# EAGLE board Steuerungsmodul (EAGLE 9.6.2)
BRD_SHEET_NAME: Steuerungsmodul Verstärker; PROJEKT_NAME: Verstärker_Innovativwoche; REVISION: 1.1; USER_NAME: Melcher-Millner/Scheffknecht
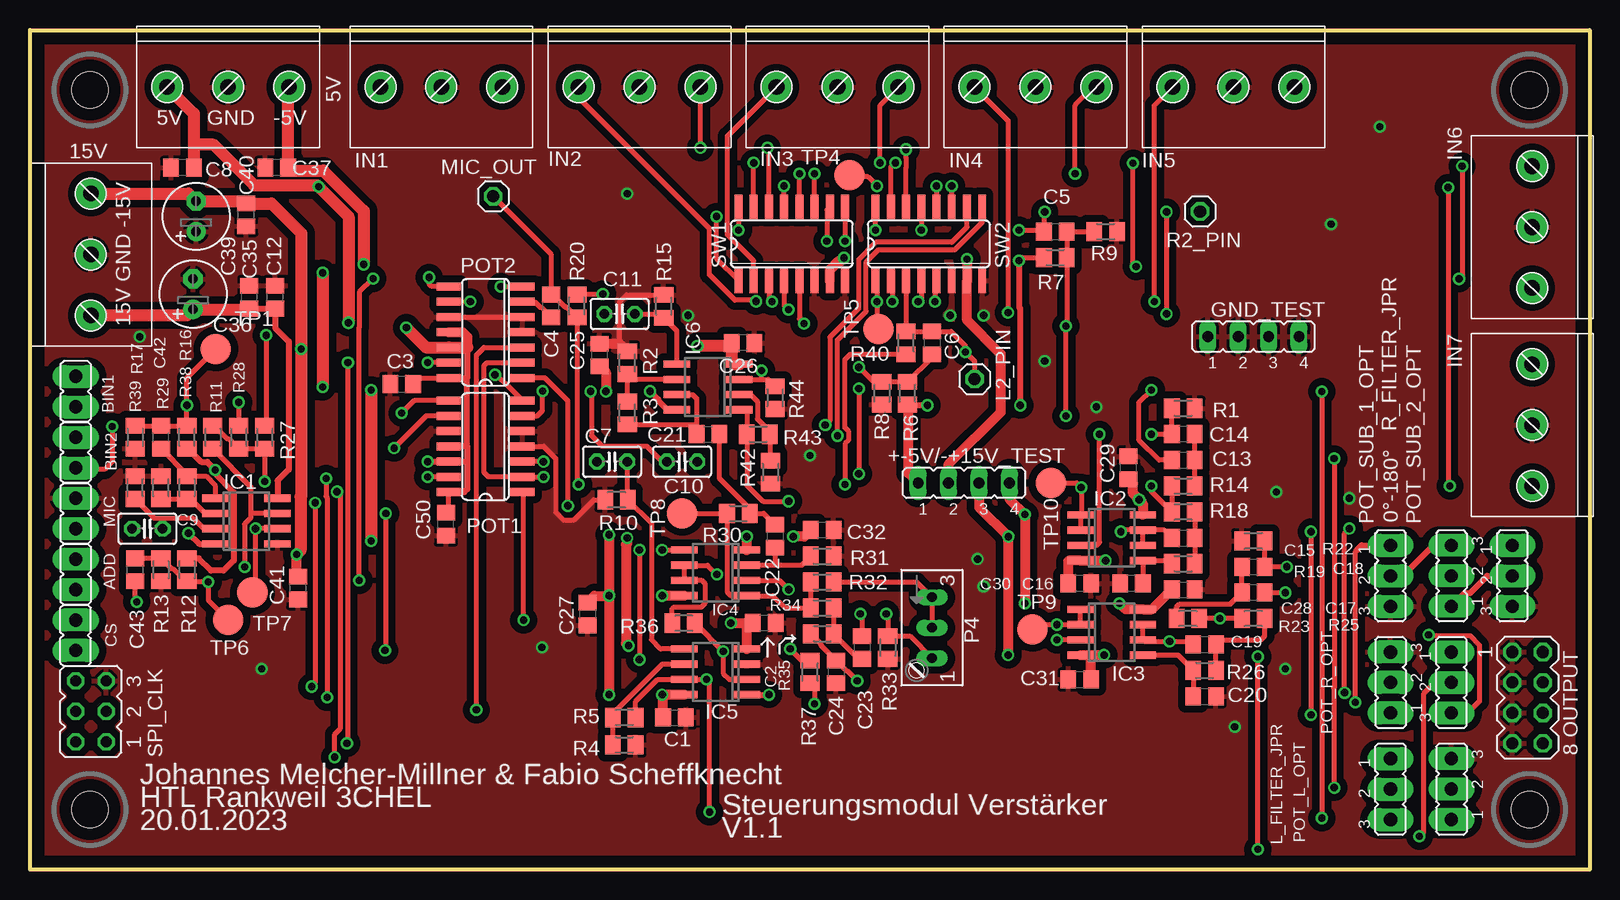
[diagram p0: board, top side]
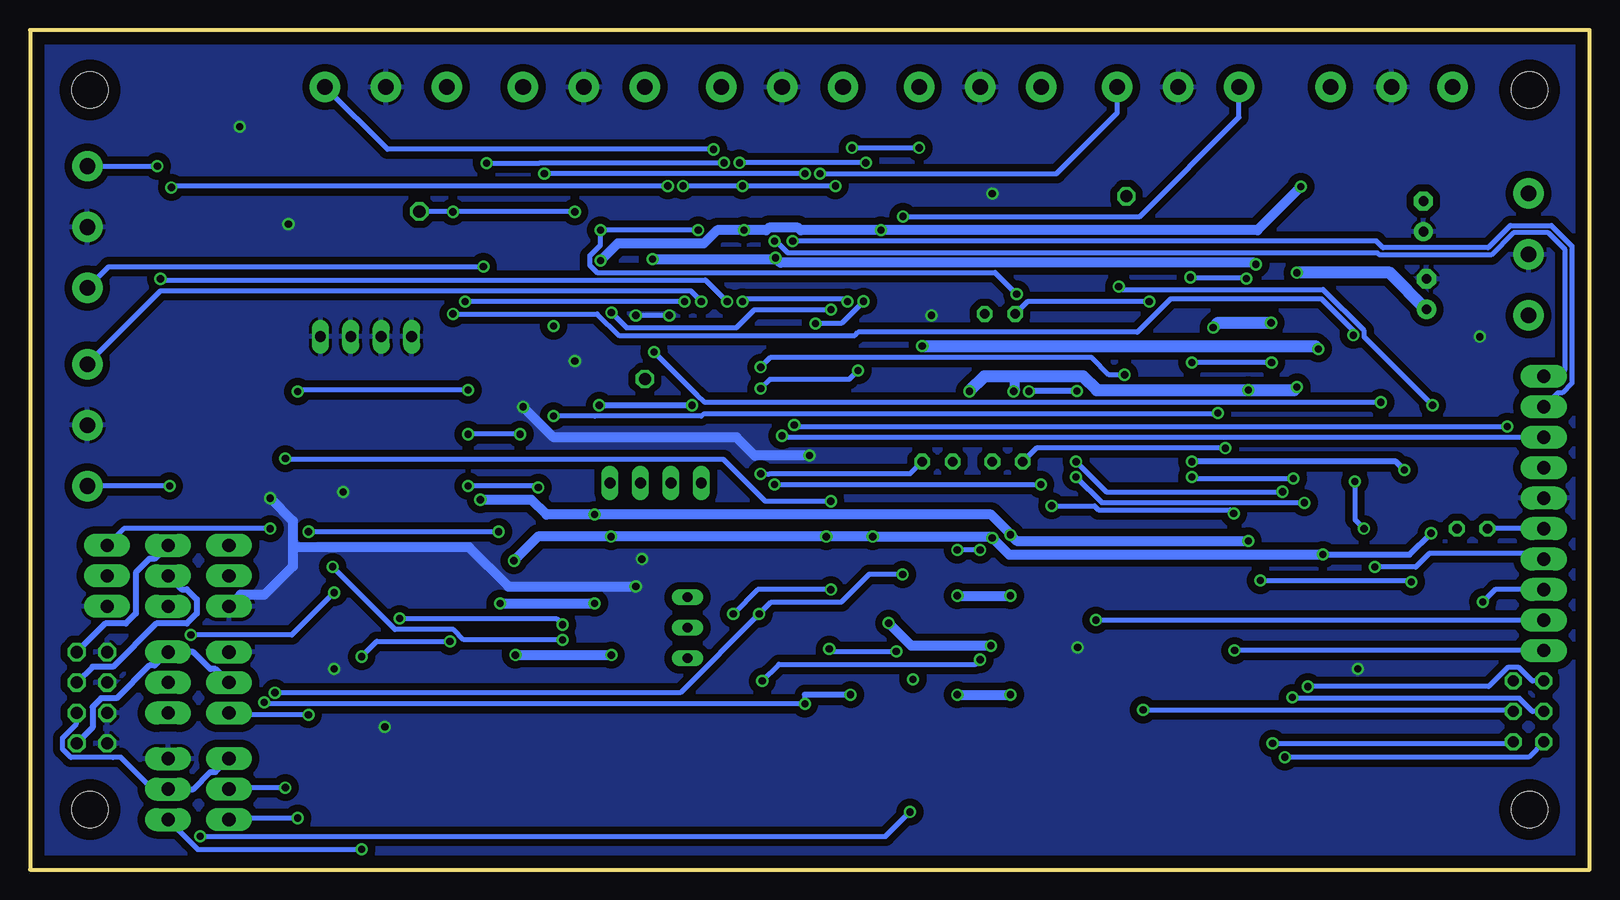
[diagram p1: board, bottom side, seen from below]

Size 130 x 70 mm. Coordinates in mm from the lower left corner, seen from the top.
Outline: 0,0 0,70 130,70 130,0 0,0
Copper layers (1*16): Top 0.035mm / dielectric 1.5mm / Bottom 0.035mm
Design rules "default *": minimum track width 16mil, minimum drill 0.6mm, track to track 8mil, track to pad 8mil, pad to pad 8mil, via to via 8mil, smd to smd 8mil, copper to edge 40mil, drill to drill 8mil, minimum pad ring 10mil, minimum via ring 8mil, stop-mask expansion 4mil, vias tented up to drill 0mil, thermal gap 10mil
Holes 3 mm at 5,5 5,65 125,65 125,5

## Footprints (pad centres in the part's own frame; a part is rotated, then mirrored left to right if it is on the bottom)
JMP3 = drill 1.1 pad 1.93 long: 1 -2.54,0; 2 0,0; 3 2.54,0
MKDS3/3_5,08 = drill 1.3 pad 2.54: P$1 -5.08,0; P$2 0,0; P$3 5.08,0
JP4 = drill 0.914 long: 1 -3.81,0; 2 -1.27,0; 3 1.27,0; 4 3.81,0
JMP2 = drill 1.1 pad 1.93 long: 1 0,-1.27; 2 0,1.27
C0805 = smd 1.3 x 1.5: 1 -0.95,0; 2 0.95,0
C025-025X050 = drill 0.813 octagon: 1 -1.27,0; 2 1.27,0
E2,5-6 = drill 0.813 pad 1.6: + -1.27,0 | drill 0.813 pad 1.6 octagon: - 1.27,0
SO08 = smd 0.6 x 2.2: 1 -1.905,-2.6; 2 -0.635,-2.6; 3 0.635,-2.6; 4 1.905,-2.6; 5 1.905,2.6; 6 0.635,2.6; 7 -0.635,2.6; 8 -1.905,2.6
1X01 = drill 1.016 octagon: 1 0,0
MA04-2 = drill 1.016 octagon: 1 -3.81,-1.27; 2 -3.81,1.27; 3 -1.27,-1.27; 4 -1.27,1.27; 5 1.27,-1.27; 6 1.27,1.27; 7 3.81,-1.27; 8 3.81,1.27
S64W = drill 0.813 long: A 2.54,1.27; E -2.54,1.27; S 0,1.27
SO14 = smd 0.66 x 2.032: 1 -3.81,-3.073; 2 -2.54,-3.073; 3 -1.27,-3.073; 4 0,-3.073; 5 1.27,-3.073; 6 2.54,-3.073; 7 3.81,-3.073; 8 3.81,3.073; 9 2.54,3.073; 10 1.27,3.073; 11 0,3.073; 12 -1.27,3.073; 13 -2.54,3.073; 14 -3.81,3.073
M0805 = smd 1.3 x 1.6: 1 -0.95,0; 2 0.95,0
JP3Q = drill 0.914 octagon: 1 -2.54,-1.27; 2 -2.54,1.27; 3 0,-1.27; 4 0,1.27; 5 2.54,-1.27; 6 2.54,1.27
SO-16 = smd 0.66 x 2.032: 1 -4.445,-3.073; 2 -3.175,-3.073; 3 -1.905,-3.073; 4 -0.635,-3.073; 5 0.635,-3.073; 6 1.905,-3.073; 7 3.175,-3.073; 8 4.445,-3.073; 9 4.445,3.073; 10 3.175,3.073; 11 1.905,3.073; 12 0.635,3.073; 13 -0.635,3.073; 14 -1.905,3.073; 15 -3.175,3.073; 16 -4.445,3.073
B2,54 = smd 2.54 x 2.54: TP 0,0

## Placement (x,y rotation side)
0°-180°  [JMP3]  118.49,24.48 90 top
5V  5V GND -5V  [MKDS3/3_5,08]  16.51,65.25 0 top
15V  15V GND -15V  [MKDS3/3_5,08]  5.08,51.28 90 top
+-5V/-+15V_TEST  [JP4]  77.85,32.23 0 top
ADD  [JMP2]  3.81,24.61 0 top
BIN1  1A0 1A1  [JMP2]  3.81,39.85 0 top
BIN2  2A0 2A1  [JMP2]  3.81,34.77 0 top
C1  100nF  [C0805]  53.72,12.67 0 top
C2  100nF  [C0805]  61.21,20.55 180 top
C3  100n  [C0805]  30.99,40.48 0 top
C4  [C0805]  43.43,46.99 90 top
C5  [C0805]  85.47,53.19 0 top
C6  [C0805]  75.18,43.91 270 top
C7  1uF  [C025-025X050]  48.51,34.01 0 top
C8  [C0805]  12.7,58.52 180 top
C9  1uF  [C025-025X050]  9.78,28.42 0 top
C10  1uF  [C025-025X050]  54.36,34.01 0 top
C11  1uF  [C025-025X050]  49.15,46.33 0 top
C12  100nF  [C0805]  20.45,47.72 90 top
C13  100nF  [C0805]  96.14,34.13 0 top
C14  100nF  [C0805]  96.14,36.29 180 top
C15  2.2nF  [C0805]  96.14,27.66 0 top
C16  1nF  [C0805]  91.82,23.85 180 top
C17  100nF  [C0805]  101.98,23.09 180 top
C18  100nF  [C0805]  101.98,25.25 0 top
C19  2.2nF  [C0805]  97.92,18.77 0 top
C20  1nF  [C0805]  97.92,14.45 0 top
C21  100nF  [C0805]  56.52,36.29 0 top
C22  100nF  [C0805]  62.1,27.79 270 top
C23  33nF  [C0805]  69.34,18.51 270 top
C24  10nF  [C0805]  67.18,16.48 270 top
C25  100nF  [C0805]  47.5,42.9 90 top
C26  100nF  [C0805]  59.44,43.91 180 top
C27  100nF  [C0805]  46.48,21.31 270 top
C28  100nF  [C0805]  96.14,23.34 0 top
C29  100nF  [C0805]  91.57,33.5 90 top
C30  100nF  [C0805]  87.5,23.85 180 top
C31  100nF  [C0805]  87.5,15.85 0 top
C32  100nF  [C0805]  66.04,28.29 180 top
C35  220pF  [C0805]  18.29,47.72 90 top
C36  100µF  [E2,5-6]  13.59,47.98 90 top
C37  [C0805]  20.57,58.52 180 top
C39  100µF  [E2,5-6]  13.84,54.45 90 top
C40  220pF  [C0805]  18.03,54.58 90 top
C41  100nF  [C0805]  22.35,23.47 90 top
C42  [C0805]  10.92,36.04 90 top
C43  [C0805]  8.76,24.99 90 top
C50  100n  [C0805]  34.67,28.79 90 top
CS  CS1 CS2  [JMP2]  3.81,19.53 180 top
GND_TEST  [JP4]  101.98,44.42 0 top
IC1  TL072D  [SO08]  18.03,29.05 270 top
IC2  TL072D  [SO08]  90.17,27.66 270 top
IC3  TL072D  [SO08]  90.17,19.78 270 top
IC4  TL072D  [SO08]  57.15,24.74 90 top
IC5  TL072D  [SO08]  57.15,16.48 90 top
IC6  TL072D  [SO08]  56.52,40.23 90 top
IN1  [MKDS3/3_5,08]  34.29,65.25 0 top
IN2  [MKDS3/3_5,08]  50.8,65.25 0 top
IN3  [MKDS3/3_5,08]  67.31,65.25 0 top
IN4  [MKDS3/3_5,08]  83.82,65.25 0 top
IN5  [MKDS3/3_5,08]  100.33,65.25 0 top
IN6  [MKDS3/3_5,08]  125.22,53.57 270 top
IN7  [MKDS3/3_5,08]  125.22,37.06 270 top
L2_PIN  [1X01]  78.74,40.89 0 top
L_FILTER_JPR  [JMP3]  113.41,6.7 270 top
MIC  [JMP2]  3.81,29.69 0 top
MIC_OUT  [1X01]  38.61,56.13 0 top
OUTPUT  [MA04-2]  124.84,14.32 270 top
P4  100k  [S64W]  73.91,20.16 270 top
POT1  MCP42010_SO14  [SO14]  37.97,35.28 90 top
POT2  MCP42010_SO14  [SO14]  37.97,44.8 90 top
POT_L_OPT  [JMP3]  118.49,6.7 90 top
POT_R_OPT  [JMP3]  113.41,15.59 90 top
POT_SUB_1_OPT  [JMP3]  113.41,24.48 270 top
POT_SUB_2_OPT  [JMP3]  123.57,24.48 270 top
R1  22k  [M0805]  96.14,38.45 180 top
R2  10k  [M0805]  49.78,42.26 270 top
R2_PIN  [1X01]  97.54,54.86 0 top
R3  47k  [M0805]  49.78,38.07 270 top
R4  10k  [M0805]  49.53,10.39 180 top
R5  47k  [M0805]  49.53,12.67 0 top
R6  [M0805]  73.15,39.72 270 top
R7  [M0805]  85.47,51.03 180 top
R8  [M0805]  70.99,39.72 90 top
R9  [M0805]  89.66,53.19 180 top
R10  100k  [M0805]  48.9,30.83 0 top
R11  [M0805]  15.24,36.04 90 top
R12  [M0805]  13.08,24.99 90 top
R13  [M0805]  10.92,24.99 90 top
R14  12k  [M0805]  96.14,31.98 180 top
R15  100k  [M0805]  52.83,46.96 270 top
R16  [M0805]  13.08,36.04 270 top
R17  [M0805]  8.76,36.04 90 top
R18  2.7k  [M0805]  96.14,29.82 0 top
R19  4.7k  [M0805]  96.14,25.5 180 top
R20  [M0805]  45.59,46.99 270 top
R22  22k  [M0805]  101.98,27.4 0 top
R23  12k  [M0805]  96.52,20.93 0 top
R25  2.7k  [M0805]  101.98,20.93 0 top
R26  4.7k  [M0805]  97.92,16.61 180 top
R27  [M0805]  19.56,36.04 90 top
R28  [M0805]  17.4,36.04 90 top
R29  10k  [M0805]  10.92,31.85 270 top
R30  56k  [M0805]  59.05,29.69 180 top
R31  56k  [M0805]  66.04,26.13 180 top
R32  47k  [M0805]  66.04,23.98 180 top
R33  100k  [M0805]  71.5,18.51 90 top
R34  75k  [M0805]  66.04,21.82 180 top
R35  150k  [M0805]  66.04,19.66 180 top
R36  10k  [M0805]  54.48,20.55 0 top
R37  10k  [M0805]  65.02,16.48 270 top
R38  1M  [M0805]  13.08,31.85 90 top
R39  100k  [M0805]  8.76,31.85 270 top
R40  [M0805]  73.03,43.91 270 top
R42  10k  [M0805]  61.72,33.12 90 top
R43  47k  [M0805]  60.71,36.29 180 top
R44  100k  [M0805]  62.1,39.34 90 top
R_FILTER_JPR  [JMP3]  118.49,15.59 270 top
SPI_CLK  [JP3Q]  5.08,13.18 90 top
SW1  4052  [SO-16]  63.5,52.17 0 top
SW2  4052  [SO-16]  74.93,52.17 0 top
TP1  TPB2,54  [B2,54]  15.49,43.41 0 top
TP4  TPB2,54  [B2,54]  68.33,57.88 0 top
TP5  TPB2,54  [B2,54]  70.74,45.06 0 top
TP6  TPB2,54  [B2,54]  16.51,20.8 0 top
TP7  TPB2,54  [B2,54]  18.54,23.09 0 top
TP8  TPB2,54  [B2,54]  54.36,29.69 0 top
TP9  TPB2,54  [B2,54]  83.57,20.04 0 top
TP10  TPB2,54  [B2,54]  85.09,32.23 0 top
U$1  [HTL-A4-H]  -57,-51 0 top  (outside the outline)

## Library data of the parts
0°-180° 5V 15V ADD BIN1 CS IN1-IN7 L_FILTER_JPR MIC POT_L_OPT POT_R_OPT POT_SUB_1_OPT POT_SUB_2_OPT R_FILTER_JPR = 0_HTL_elektro
+-5V/-+15V_TEST GND_TEST SPI_CLK = jumper
BIN2 = 0_HTL_elektro; SPICEPREFIX: B
C1-C6 C8 C12-C32 C35-C37 C39-C43 C50 = rcl; SPICEPREFIX: C
C7 C9-C11 = resistor
IC1-IC6 = linear
L2_PIN MIC_OUT R2_PIN = pinhead
OUTPUT = con-lstb; OC_FARNELL: unknown; OC_NEWARK: unknown
P4 = pot
POT1 POT2 SW1 SW2 = 0_Custom-Lib_Verstärker
R1-R20 R22 R23 R25-R40 R42-R44 = rcl; SPICEPREFIX: R
TP1 TP4-TP10 = testpad
U$1 = 0_HTL_frame; BRD_SHEET_NAME: Steuerungsmodul Verstärker; PROJEKT_NAME: Verstärker_Innovativwoche; REVISION: 1.1; USER_NAME: Melcher-Millner/Scheffknecht

## Nets
1A0: BIN1.1 SW1.10
1A1: BIN1.2 SW1.9
2A0: BIN2.1 SW2.10
2A1: BIN2.2 SW2.9
+5V: 5V.P$1 +-5V/-+15V_TEST.1 C3.2 C8.1 C50.2 POT1.11 POT1.12 POT1.14 POT2.11 POT2.12 POT2.14 R6.2 R7.2 R12.2 R16.2 SW1.16 SW2.16
+15V: 15V.P$1 +-5V/-+15V_TEST.4 C1.1 C12.1 C25.1 C27.1 C28.1 C29.1 C35.1 C36.+ IC1.8 IC2.8 IC3.8 IC4.8 IC5.8 IC6.8
-5V: 5V.P$3 +-5V/-+15V_TEST.2 C37.1 SW1.7 SW2.7
-15V: 15V.P$3 +-5V/-+15V_TEST.3 C2.2 C26.2 C30.2 C31.2 C32.2 C39.- C40.2 C41.2 IC1.4 IC2.4 IC3.4 IC4.4 IC5.4 IC6.4
GND: 5V.P$2 15V.P$2 C1.2 C2.1 C3.1 C8.2 C12.2 C16.2 C20.2 C24.2 C25.2 C26.1 C27.2 C28.2 C29.2 C30.1 C31.1 C32.1 C35.2 C36.- C37.2 C39.+ C40.1 C41.1 C50.1 GND_TEST.1 GND_TEST.2 GND_TEST.3 GND_TEST.4 IC1.5 IC5.3 IN1.P$2 IN2.P$2 IN3.P$2 IN4.P$2 IN5.P$2 IN6.P$2 IN7.P$2 MIC.2 OUTPUT.1 OUTPUT.3 OUTPUT.5 OUTPUT.7 POT1.4 POT1.5 POT1.10 POT2.4 POT2.5 POT2.10 POT_L_OPT.3 POT_R_OPT.3 POT_SUB_1_OPT.3 POT_SUB_2_OPT.3 R1.1 R2.1 R4.1 R8.1 R9.1 R10.1 R13.1 R15.1 R17.1 R22.1 R29.1 R31.1 R33.1 R39.1 R42.1 R44.1 SPI_CLK.5 SW1.6 SW1.8 SW2.6 SW2.8
L1: SW1.3 SW2.1 TP5.TP
L2: C6.1 L2_PIN.1 R28.2 R40.1 SW2.3
L3: C6.2 POT1.7 R6.1 R8.2
L4: C10.1 POT1.6
L5: C10.2 IC6.3 R44.2
L6: IC6.1 L_FILTER_JPR.2 R43.2
L_IN: C13.1 L_FILTER_JPR.3
L_OUT: L_FILTER_JPR.1 OUTPUT.6 POT_L_OPT.2
N$1: CS.2 POT2.1
N$2: CS.1 POT1.1
N$3: IC5.1 POT_SUB_1_OPT.1 R37.2
N$10: POT1.3 SPI_CLK.2
N$17: IC6.2 R42.2 R43.1
N$24: IC6.6 R2.2 R3.1
N$26: POT2.13 SPI_CLK.1
N$28: IC5.6 R4.2 R5.1
N$30: C9.1 MIC.1
N$31: POT1.13 SPI_CLK.4
N$32: POT2.3 SPI_CLK.3
N$34: C4.1 POT2.6
N$36: C42.2 POT2.7 R16.1 R17.2 TP1.TP
N$37: POT1.2 POT2.2 SPI_CLK.6
N$38: IN1.P$3 SW1.12
N$39: IN1.P$1 SW1.1
N$40: IN2.P$3 SW1.14
N$41: IN2.P$1 SW1.5
N$42: IN3.P$3 SW1.15
N$43: IN3.P$1 SW1.2
N$44: IN4.P$3 SW1.11
N$45: IN4.P$1 SW1.4
N$46: IN5.P$3 SW2.14
N$47: IN5.P$1 SW2.5
N$48: IN6.P$3 SW2.15
N$49: IN6.P$1 SW2.2
N$50: IN7.P$3 SW2.11
N$51: IN7.P$1 SW2.4
N$53: C9.2 IC1.3 R39.2
N$56: IC2.1 IC2.2 R14.2 R18.1 TP10.TP
N$57: C14.2 IC2.3 R1.2
N$58: C13.2 C14.1 R14.1
N$59: C15.2 R18.2 R19.1
N$60: C16.1 IC2.5 R19.2
N$61: C15.1 IC2.6 IC2.7 POT_R_OPT.1
N$62: IC1.2 R29.2 R38.1
N$64: ADD.1 C43.1
N$65: IC3.1 IC3.2 R23.2 R25.1 TP9.TP
N$66: C18.2 IC3.3 R22.2
N$67: C17.2 C18.1 R23.1
N$68: C19.2 R25.2 R26.1
N$69: C20.1 IC3.5 R26.2
N$70: C19.1 IC3.6 IC3.7 POT_L_OPT.1
N$71: C42.1 IC1.1 R38.2
N$72: C4.2 MIC_OUT.1 R20.2 R40.2
N$73: C21.2 C22.1 R30.1
N$74: C22.2 IC4.3 R31.2
N$75: IC4.1 R30.2 R32.2 R34.2 TP8.TP
N$76: IC4.2 P4.A R33.2
N$77: P4.E P4.S R32.1
N$78: C24.1 IC4.5 R35.2
N$79: C23.2 R34.1 R35.1
N$80: IC5.2 R36.2 R37.1
N$81: 0°-180°.1 POT_SUB_2_OPT.2
R1: SW1.13 SW2.12 TP4.TP
R2: C5.1 R2_PIN.1 R20.1 R27.2 SW2.13
R3: C5.2 POT1.8 R7.1 R9.2
R4: C7.1 POT1.9
R5: C7.2 IC5.5 R10.2
R6: IC5.7 R5.2 R_FILTER_JPR.2
R_IN: C17.1 R_FILTER_JPR.3
R_OUT: OUTPUT.8 POT_R_OPT.2 R_FILTER_JPR.1
SUB1: IC1.6 R11.2 R27.1 R28.1 TP7.TP
SUB2: ADD.2 IC1.7 R11.1
SUB3: C43.2 POT2.8 R12.1 R13.2 TP6.TP
SUB4: C11.1 POT2.9
SUB5: C11.2 IC6.5 R15.2
SUB_IN: C21.1 IC6.7 R3.2
SUB_OUT_1: 0°-180°.3 OUTPUT.2 POT_SUB_1_OPT.2
SUB_OUT_2: 0°-180°.2 OUTPUT.4
SUB_PHASE: C23.1 IC4.6 IC4.7 POT_SUB_2_OPT.1 R36.1

## Tracks (layer width: path | path; a pad name or v marks a point on that pad's centre or on a via)
1A0  (via drill 0.6)
  Top 0.406: SW1.10 66.42,54.99 v66.42,52.4
  Bottom 0.406: BIN1.1 2.64,39.75 2.28,39.75 1.47,40.55 1.47,51.99 3.17,53.69 6.6,53.69 8.45,51.85 17.21,51.85 17.76,52.4 v66.42,52.4
1A1  (via drill 0.6)
  Top 0.406: SW1.9 v67.94,52.4
  Bottom 0.406: v67.94,52.4 67.82,52.4 66.82,51.4 17.66,51.4 17.5,51.24 8.19,51.24 6.35,53.08 3.43,53.08 2.08,51.74 2.08,41.63 2.59,41.12 BIN1.2
2A0  (via drill 0.6)
  Top 0.406: v6.86,36.95 6.86,34.01 6.22,33.37 3.94,33.37 BIN2.1 | SW2.10 78.11,53.57 76.83,52.3 70.48,52.3 69.06,50.87 69.06,46.77 66.67,44.38 66.67,37.44 v66.29,37.06
  Bottom 0.406: v66.29,37.06 66.19,36.95 v6.86,36.95
2A1  (via drill 0.6)
  Top 0.406: SW2.9 79.38,53.97 77.09,51.69 70.74,51.69 69.7,50.65 69.7,46.54 67.31,44.15 v67.31,36.17
  Bottom 0.406: v67.31,36.17 67.18,36.04 BIN2.2
+5V  (via drill 0.6)
  Top 0.406: SW1.16 v59.05,53.31 | v70.48,53.31 SW2.16 | v82.44,50.77 82.7,51.03 R7.2 | C3.2 32.45,40.99 POT2.14 | C50.2 34.9,29.96 POT1.14
  Top 0.508: v82.44,50.77 82.44,46.88 82.55,46.78 v82.55,38.71 | v74.8,38.71 73.22,38.71 R6.2 | 36.45,43.53 36.45,40.99 | POT2.14 36.45,40.99 | 36.45,35.28 36.45,40.99 | 36.45,35.28 POT1.11 | 36.45,35.28 36.45,34.01 | 36.45,34.01 POT1.12 v33.15,34.01 | 36.45,34.01 36.45,31.72 36.2,31.47 POT1.14 | R16.2 13.14,35.09 14.25,33.98 14.77,33.98 v15.44,33.32 15.44,33 16.99,31.45 16.99,25.77 16.15,24.92 15.1,24.92 14.07,25.94 R12.2
  Top 0.813: POT2.11 36.07,44.8 36.45,44.42 36.45,43.53 | +-5V/-+15V_TEST.1 73.22,33.05 73.22,38.71
  Top 1.016: v26.54,45.59 26.54,54.45 v24.07,56.93 23.94,57.06 18.68,57.06 15.31,60.42 13.78,60.42 13.65,60.3 | 13.65,60.3 13.65,63.03 5V.P$1 | 13.65,60.3 C8.1 | v31.37,45.18 33.02,43.53 POT2.12 36.45,43.53
  Bottom 0.508: v74.8,38.71 v82.55,38.71 | v15.44,33.32 16.13,34.01 v33.15,34.01
  Bottom 0.813: v24.07,56.93 27.69,53.31 v59.05,53.31 65.76,53.31 65.96,53.52 68.41,53.52 68.61,53.31 v70.48,53.31 72.72,53.31 73.83,52.2 81.02,52.2 v82.44,50.77
  Bottom 1.016: v26.54,45.59 30.97,45.59 v31.37,45.18
+15V  (via drill 0.6)
  Top 0.406: IC6.8 53.14,38.33
  Top 0.508: C35.1 C12.1 20.45,45.15 21.57,44.03 21.57,33.35 20.63,32.42 IC1.8 | v51.68,39.88 52.36,39.2 52.36,39.11 53.14,38.33
  Top 0.813: IC5.8 v52.7,14.58 52.77,14.51 C1.1 | v48.26,27.91 v48.26,22.83 | v48.26,22.83 v48.26,14.58 | IC4.8 v52.7,22.83 | IC2.8 92.77,30.52 v92.46,30.83 91.95,31.34 91.95,32.17 C29.1 | v90.81,22.2 91.31,21.69 IC3.8 93.54,21.69 C28.1 | v82.93,22.2 v82.93,29.59 81.66,30.86 +-5V/-+15V_TEST.4 | C27.1 47.06,22.83 v48.26,22.83 | C25.1 48.01,41.44 v48.01,39.87
  Top 1.016: 15V.P$1 13.08,46.2 C36.+ 18.22,46.71 C35.1 | v24.38,49.76 v24.38,40.23 | v28.45,39.98 v28.45,27.4
  Bottom 0.813: v52.7,14.58 v48.26,14.58 | v28.45,27.4 47.75,27.4 v48.26,27.91 48.26,27.96 49.89,29.59 v82.93,29.59 86.95,29.59 88.19,30.83 v92.46,30.83 | v52.7,22.83 v48.26,22.83 | v90.81,22.2 v82.93,22.2 | v48.01,39.87 47.88,40 47.88,41.12
  Bottom 1.016: C36.+ 16.64,49.76 v24.38,49.76 | v24.38,40.23 24.64,39.98 v28.45,39.98 41.08,39.98 42.22,41.12 47.88,41.12 50.44,41.12 v51.68,39.88
-5V  (via drill 0.6)
  Top 0.813: +-5V/-+15V_TEST.2 76.58,33.79 80.9,38.11 80.9,43 78.11,45.79 SW2.7 v78.11,50.9 | SW1.7 66.67,50.03 67.36,50.72 67.57,50.72 v67.84,51
  Top 1.016: 5V.P$3 21.52,65.18 C37.1 21.77,58.28 24.45,58.28 27.81,54.91 v27.81,50.46
  Bottom 0.813: v78.11,50.9 67.94,50.9 v67.84,51 67.43,50.59 27.94,50.59 v27.81,50.46
-15V  (via drill 0.6)
  Top 0.508: v13.21,28.04 14.1,27.15 IC1.4
  Top 0.813: IC4.4 v59.75,27.76 | v49.78,27.66 49.78,27.2 49.69,27.1 49.69,18.86 v49.89,18.66 | v58.42,20.55 59.69,20.55 | 59.69,20.55 C2.2 | IC5.4 59.75,20.49 59.69,20.55 | IC3.4 88.39,17.88 | 88.39,17.88 v89.53,17.88 | v81.53,17.88 81.53,27.73 v81.56,27.76 79.12,30.2 +-5V/-+15V_TEST.3 | C30.2 86.55,25.69 86.61,25.75 IC2.4 v89.66,25.75 | C32.2 64.56,27.76 v63.63,27.76 | C41.2 22.23,24.54 v22.23,26.26 | C31.2 88.45,17.82 88.39,17.88
  Top 1.016: 15V.P$3 13.21,56.36 C39.- 17.84,55.73 C40.2 20.13,55.53 22.61,53.06 v22.61,43.41 22.61,31.13 22.55,31.08 22.55,26.59 v22.23,26.26 | v55.63,43.64 58.21,43.64 C26.2 58.49,42.32 58.67,42.14 IC6.4
  Bottom 0.508: v22.23,26.26 14.99,26.26 v13.21,28.04
  Bottom 0.813: v22.23,26.26 48.39,26.26 v49.78,27.66 49.88,27.76 v59.75,27.76 v63.63,27.76 v81.56,27.76 87.66,27.76 v89.66,25.75 | v49.89,18.66 56.54,18.66 v58.42,20.55 | v89.53,17.88 v81.53,17.88
  Bottom 1.016: v55.63,43.64 22.84,43.64 v22.61,43.41
GND  (via drill 0.6)
  Top 0.406: 49.15,43.85 49.15,47.34 49.72,47.91 R15.1 | POT1.4 42.81,35.28 43.81,34.28 43.81,29.8 44.45,29.16 45.34,29.16 47.01,30.83 R10.1 | POT2.10 POT2.5
  Top 0.813: C25.2 49.15,43.85 R2.1
  Bottom 0.406: v76.71,46.2 v79.5,46.2
  Bottom 0.813: POT_SUB_1_OPT.3 112.45,22.91 110.46,22.91 108.1,25.27 108.1,26.9 | v79.5,23.59 90.12,23.59 93.39,26.87 108.07,26.87 108.1,26.9 | v109.98,30.96 108.1,29.08 108.1,26.9 | v65.02,34.52 69.59,34.52 71.1,36.03 86.35,36.03 v88.9,38.58
  other vias: 19.3,16.74 42.67,18.51 9.14,44.42 100.42,11.89 78.99,25.88 84.58,42.39 103.89,31.47 104.65,16.74 108.46,53.82 112.52,61.95 49.78,56.36 54.86,46.2
  pour Top (isolate 0.61): 0,0 130,0 130,70 0,70
  pour Bottom (isolate 0.61): 0,0 0,70 130,70 130,0
L1  (via drill 0.6)
  Top 0.406: SW2.1 70.61,48.97 v70.61,47.34 70.61,45.18 TP5.TP | SW1.3 61.59,47.6 v61.85,47.34
  Bottom 0.406: v61.85,47.34 62.1,47.6 70.36,47.6 v70.61,47.34
L2  (via drill 0.6)
  Top 0.406: v17.4,38.96 R28.2 | SW2.3 R40.1 C6.1 76.77,44.86 77.98,43.66 v77.98,43.15 78.74,42.39 L2_PIN.1
  Bottom 0.406: v77.98,43.15 74.44,39.62 74.43,39.62 73.77,38.96 v17.4,38.96
L3  (via drill 0.6)
  Top 0.406: POT1.7 39.88,40.26 39.86,40.26 38.87,41.25 v38.76,41.25 | v69.09,41.88 70.3,40.67 R8.2 R6.1 75.18,42.7 C6.2
  Bottom 0.406: v38.76,41.25 40.04,41.25 41.47,42.67 68.3,42.67 v69.09,41.88
L4  (via drill 0.6)
  Top 0.406: POT1.6 42.29,37.82 42.73,38.25 v42.73,39.91 | v46.74,39.87 46.8,39.81 46.8,36.18 47.67,35.3 51.41,35.3 52.7,34.01 C10.1
  Bottom 0.508: v42.73,39.91 46.7,39.91 v46.74,39.87
L5  (via drill 0.6)
  Top 0.406: v69.09,40.1 v69.09,32.99 | IC6.3 60.98,40.87 | 60.98,40.87 61.53,40.87 R44.2 | 60.98,40.87 v60.98,41.6
  Bottom 0.406: v69.09,40.1 68.33,40.87 61.72,40.87 v60.98,41.6 | v69.09,32.99 68.34,32.99 68.32,33.01 56.62,33.01 C10.2
L6  (via drill 0.6)
  Top 0.406: IC6.1 59.75,38.33 59.76,38.32 R43.2 59.76,32.04 61.09,30.71 v63.25,30.71 | v108.71,34.26 108.71,15.16 108.67,15.12 108.67,6.87 v108.71,6.83
  Bottom 0.406: v63.25,30.71 68.71,30.71 72.2,34.2 108.65,34.2 v108.71,34.26 | v108.71,6.83 113.28,6.83 L_FILTER_JPR.2
L_IN  (via drill 0.6)
  Top 0.406: C13.1 94.11,34.13 92.46,35.79 92.46,38.96 v93.47,39.98 | v107.7,39.85 v107.7,4.29
  Bottom 0.406: v93.47,39.98 107.57,39.98 v107.7,39.85 | v107.7,4.29 113.28,4.29 L_FILTER_JPR.3
L_OUT
  Bottom 0.406: POT_L_OPT.2 119.76,6.7 122.43,9.37 123.06,9.37 123.09,9.35 126.59,9.35 127.28,10.03 127.28,11 126.11,12.16 OUTPUT.6
  Bottom 0.508: L_FILTER_JPR.1 114.53,8.12 114.97,8.12 116.39,6.7 POT_L_OPT.2
N$1  (via drill 0.6)
  Top 0.406: POT2.1 42.93,40.99 44.83,39.09 v44.83,30.32 | v29.66,29.68 29.66,18.33 v29.59,18.26
  Bottom 0.406: CS.2 v29.59,18.26 | v44.83,30.32 41.26,30.32 40.92,29.98 29.96,29.98 v29.66,29.68
N$2  (via drill 0.6)
  Top 0.406: v41.15,20.8 41.15,31.37 POT1.1
  Bottom 0.406: v41.15,20.8 CS.1
N$3  (via drill 0.6)
  Top 0.406: R37.2 65.41,15.15 v65.41,13.81 | v110.49,13.94 110.49,26.52 110.62,26.64
  Top 0.508: IC5.1 v61.59,14.58 | 110.62,26.64 111,27.02 POT_SUB_1_OPT.1
  Bottom 0.406: 65.41,14.58 v65.41,13.81 110.36,13.81 v110.49,13.94
  Bottom 0.508: v61.59,14.58 65.41,14.58
N$10  (via drill 0.6)
  Top 0.406: v42.8,34.01 POT1.3 | v25.4,9.37 25.4,11.27 25.84,11.71 25.84,31.24 v25.59,31.5
  Bottom 0.406: v42.8,34.01 40.29,31.5 v25.59,31.5 | SPI_CLK.2 5.08,9.37 v25.4,9.37
N$17
  Top 0.406: IC6.2 60.07,39.6 60.64,39.03 60.64,37.56 61.66,36.55 R43.1 61.72,36.23 R42.2
N$24
  Top 0.406: IC6.6 50.23,40.87 R2.2 R3.1
N$26  (via drill 0.6)
  Top 0.406: POT2.13 v33.15,42.26 | v26.5,42.26 26.5,10.6 v26.42,10.51
  Bottom 0.406: v26.42,10.51 6.48,10.51 SPI_CLK.1 | v26.5,42.26 v33.15,42.26
N$28
  Top 0.406: IC5.6 52.7,17.12 48.58,12.99 R5.1 R4.2
N$30
  Bottom 0.406: MIC.1 C9.1
N$31  (via drill 0.6)
  Top 0.406: POT1.13 v33.15,32.74 | v24.77,14.34 24.77,31.04 24.68,31.12 v24.68,32.61
  Bottom 0.406: v33.15,32.74 33.02,32.61 v24.68,32.61 | SPI_CLK.4 4.77,13.18 5.89,14.3 24.72,14.3 v24.77,14.34
N$32  (via drill 0.6)
  Top 0.406: v37.21,13.31 37.21,42.9 37.85,43.53 POT2.3
  Bottom 0.406: v37.21,13.31 6.48,13.31 SPI_CLK.3
N$34
  Top 0.406: C4.1 42.59,46.88 42.52,46.88 42.06,47.34 POT2.6
N$36  (via drill 0.6)
  Top 0.406: R17.2 C42.2 R16.1 v13.08,38.71 13.08,40.99 TP1.TP | v39.24,48.61 POT2.7
  Bottom 0.406: v13.08,38.71 18.77,44.4 18.77,44.93 22.21,48.36 38.99,48.36 v39.24,48.61
N$37  (via drill 0.6)
  Top 0.406: POT2.2 38.1,42.26 37.85,42.01 37.85,33.12 38.23,32.74 POT1.2 42.8,32.74 v42.81,32.73 | v23.77,30.58 23.77,15.55 v23.47,15.25
  Bottom 0.406: v42.81,32.73 40.67,30.59 v23.78,30.59 v23.77,30.58 | v23.47,15.25 8.4,15.25 6.81,16.84 5.89,16.84 4.77,15.72 SPI_CLK.6
N$38  (via drill 0.6)
  Top 0.406: SW1.12 v64.14,58.01
  Bottom 0.406: v64.14,58.01 44.45,58.01 39.37,63.09 IN1.P$3
N$39  (via drill 0.6)
  Top 0.406: SW1.1 57.24,50.91 v57.24,54.45
  Bottom 0.406: v57.24,54.45 37.47,54.45 29.21,62.71 IN1.P$1
N$40  (via drill 0.6)
  Top 0.406: SW1.14 61.59,60.04 v61.47,60.17 | v55.88,60.17 IN2.P$3
  Bottom 0.406: v61.47,60.17 v55.88,60.17
N$41  (via drill 0.6)
  Top 0.406: IN2.P$1 45.72,64.36 56.63,53.45 56.63,49.6 58.76,47.47 60.42,47.47 v60.51,47.37 | SW1.5 64.14,45.91 v64.52,45.52
  Bottom 0.406: v60.51,47.37 62.36,45.52 v64.52,45.52
N$42  (via drill 0.6)
  Top 0.406: SW1.15 v60.33,58.92 | v70.87,58.92 70.87,63.73 IN3.P$3
  Bottom 0.406: v60.33,58.92 v70.87,58.92
N$43
  Top 0.406: SW1.2 60.33,50.76 58.15,52.94 58.15,61.15 62.23,65.23 IN3.P$1
N$44  (via drill 0.6)
  Top 0.406: SW1.11 v65.41,58.01 | v87.12,58.01 87.12,63.73 88.65,65.25 IN4.P$3
  Bottom 0.406: v65.41,58.01 v87.12,58.01
N$45  (via drill 0.6)
  Top 0.406: IN4.P$1 81.53,62.46 v81.53,46.43 | SW1.4 62.87,47.05 v63.23,46.69
  Bottom 0.406: v81.53,46.43 80.28,45.18 71.12,45.18 69.62,46.69 v63.23,46.69
N$46  (via drill 0.6)
  Top 0.406: SW2.14 73.03,58.52 73.05,58.54 73.05,59.3 73.03,59.32 v73.03,60.04
  Bottom 0.406: v73.03,60.04 100.2,60.04 IN5.P$3
N$47  (via drill 0.6)
  Top 0.406: SW2.5 75.44,48.97 v75.44,47.34 | v93.73,47.34 93.73,63.73 IN5.P$1
  Bottom 0.406: v75.44,47.34 v93.73,47.34
N$48  (via drill 0.6)
  Top 0.406: SW2.15 71.75,58.52 71.78,58.54 71.78,58.56 v72.14,58.92 | v92.2,50.26 91.95,50.52 v91.95,58.9
  Bottom 0.406: IN6.P$3 123.44,50.26 v92.2,50.26 | v91.95,58.9 87.52,58.9 87.5,58.92 v72.14,58.92
N$49  (via drill 0.6)
  Top 0.406: SW2.2 71.88,48.97 v71.88,47.34 | v119.38,58.65 119.38,49.5 v119.13,49.25
  Bottom 0.406: v71.88,47.34 73.7,49.16 119.04,49.16 v119.13,49.25 | IN6.P$1 v119.38,58.65
N$50  (via drill 0.6)
  Top 0.406: SW2.11 v76.83,56.99 | v118.22,56.87 118.22,32.12 v118.36,31.98
  Bottom 0.406: v76.83,56.99 118.09,56.99 v118.22,56.87 | v118.36,31.98 IN7.P$3
N$51  (via drill 0.6)
  Top 0.406: SW2.4 74.3,47.6 v74.04,47.34
  Bottom 0.406: v74.04,47.34 74.04,47.36 74.93,48.25 119.11,48.25 IN7.P$1
N$53
  Top 0.406: IC1.3 14.48,28.42 13.59,29.31 11.05,29.31 | R39.2 10.35,29.31 11.05,29.31 | C9.2 11.05,29.31
N$56  (via drill 0.6)
  Top 0.406: v93.47,31.98 93.47,31.53 R18.1 R14.2 | IC2.2 IC2.1 87.63,29.62 v87.63,31.85 87.25,32.23 TP10.TP
  Bottom 0.406: v93.47,31.98 87.76,31.98 v87.63,31.85
N$57  (via drill 0.6)
  Top 0.406: IC2.3 88.9,27.02 89.15,27.28 v89.15,36.29 | v93.47,36.29 C14.2 R1.2
  Bottom 0.406: v89.15,36.29 v93.47,36.29
N$58
  Top 0.406: R14.1 C13.2 C14.1
N$59
  Top 0.406: R18.2 C15.2 R19.1
N$60
  Top 0.406: R19.2 94.94,25.75 IC2.5 C16.1
N$61  (via drill 0.6)
  Top 0.406: IC2.6 IC2.7 | C15.1 94.55,28.29 IC2.7 | IC2.7 91.06,28.29 v90.93,28.17 | v106.79,28.17 v106.79,12.9
  Bottom 0.406: v90.93,28.17 v106.79,28.17 | v106.79,12.9 113.26,12.9 POT_R_OPT.1
N$62
  Top 0.406: IC1.2 14.61,29.69 13.4,30.9 R38.1 R29.2
N$64  (via drill 0.6)
  Top 0.406: v8.89,22.32 8.76,22.45 C43.1
  Bottom 0.406: ADD.1 7.87,23.34 v8.89,22.32
N$65  (via drill 0.6)
  Top 0.406: IC3.1 IC3.2 v85.6,20.42 83.95,20.42 TP9.TP | R25.1 v99.19,20.93 R23.2
  Bottom 0.406: v99.19,20.93 86.11,20.93 v85.6,20.42
N$66  (via drill 0.6)
  Top 0.406: R22.2 C18.2 v104.78,25.25 | IC3.3 v85.6,19.15
  Bottom 0.406: v104.78,25.25 100.1,20.57 100.1,20.55 99.56,20.02 94.7,20.02 93.84,19.15 v85.6,19.15
N$67
  Top 0.406: C18.1 C17.2 100.08,22.13 95.82,22.13 95.57,21.88 R23.1
N$68
  Top 0.406: R26.1 C19.2 99.25,19.15 102.62,19.15 102.93,19.46 R25.2
N$69
  Top 0.406: IC3.5 95.7,17.88 R26.2 C20.1
N$70  (via drill 0.6)
  Top 0.406: IC3.7 IC3.6 92.9,19.02 v95,19.02 96.71,19.02 C19.1 | v102.36,1.68 v102.36,17.75
  Bottom 0.406: POT_L_OPT.1 116.73,2.41 116.73,2.39 116.03,1.68 v102.36,1.68 | v102.36,17.75 101.09,19.02 v95,19.02
N$71
  Top 0.406: C42.1 13.08,32.93 R38.2 14.67,32.8 15.43,32.04 IC1.1
N$72  (via drill 0.6)
  Top 0.406: v67.94,32.1 67.94,35.52 68.22,35.79 68.22,36.54 67.92,36.84 67.92,42.51 68.38,42.96 R40.2 | v45.74,32.1 45.59,32.25 R20.2 44.75,46.88 44.62,46.88 43.57,47.94 C4.2 43.43,51.31 MIC_OUT.1
  Bottom 0.406: v67.94,32.1 v45.74,32.1
N$73
  Top 0.406: C21.2 57.47,32.61 60.01,30.07 R30.1 61.15,29.69 C22.1
N$74
  Top 0.406: R31.2 64.33,25.37 62.1,25.37 | 62.1,25.37 IC4.3 | C22.2 62.1,25.37
N$75
  Top 0.406: R32.2 R34.2 62.93,21.82 61.91,22.83 IC4.1 58.42,22.83 58.17,23.09 58.17,29.63 R30.2 TP8.TP
N$76  (via drill 0.6)
  Top 0.406: IC4.2 62.48,24.1 v63.25,23.34 | v71.37,21.31 71.5,21.18 R33.2 73.34,19.46 P4.A
  Bottom 0.406: v63.25,23.34 69.34,23.34 v71.37,21.31
N$77
  Top 0.406: R32.1 73.91,23.98 P4.E P4.S
N$78  (via drill 0.6)
  Top 0.406: v52.7,26.64 IC4.5 | v50.8,26.64 v50.8,17.5 | R35.2 65.93,18.81 65.93,18.69 C24.1 68.03,16.59 68.1,16.59 68.34,16.35 68.34,16.34 v68.96,15.72
  Bottom 0.406: v68.96,15.72 67.56,17.12 51.18,17.12 v50.8,17.5 | v50.8,26.64 v52.7,26.64
N$79
  Top 0.406: R34.1 R35.1 69.08,17.56 C23.2
N$80  (via drill 0.6)
  Top 0.406: R36.2 v57.78,18.19 57.78,16.36 58.29,15.85 IC5.2 | R37.1 64.33,17.43 v63.37,18.39
  Bottom 0.406: v63.37,18.39 63.18,18.19 v57.78,18.19
N$81
  Top 0.508: 0°-180°.1 119.61,23.06 120.05,23.06 121.47,24.48 POT_SUB_2_OPT.2
R1  (via drill 0.6)
  Top 0.406: SW1.13 v62.87,56.99 | v75.56,56.99 SW2.12 | TP4.TP 68.45,57.76 69.85,57.76 v70.61,56.99
  Bottom 0.406: v62.87,56.99 v70.61,56.99 v75.56,56.99
R2  (via drill 0.6)
  Top 0.406: SW2.13 v74.3,53.31 | v82.44,53.31 84.39,53.31 C5.1 84.58,53.25 v84.58,54.84 | v94.74,54.84 v94.74,46.33 | R20.1 45.63,47.98 v47.75,47.98 | v19.68,44.55 19.68,37.12 R27.2
  Bottom 0.406: v74.3,53.31 v82.44,53.31 82.44,52.06 83.35,51.15 83.35,50.4 82.73,49.77 49.55,49.77 v47.75,47.98 | v84.58,54.84 v94.74,54.84 97.51,54.84 R2_PIN.1 | v94.74,46.33 82.71,46.33 80.92,44.53 61.23,44.53 60.96,44.8 37.7,44.8 34.91,47.6 22.35,47.6 19.68,44.93 v19.68,44.55
R3  (via drill 0.6)
  Top 0.406: R9.2 C5.2 R7.1 86.42,45.37 v86.36,45.31 v86.36,37.82 | POT1.8 32.02,39.09 v30.99,38.05
  Bottom 0.406: v30.99,38.05 31.33,38.05 31.41,37.97 73.87,37.97 74.05,37.8 82.93,37.8 82.95,37.82 v86.36,37.82
R4  (via drill 0.6)
  Top 0.406: POT1.9 33.04,37.82 v30.35,35.13
  Bottom 0.406: C7.1 46.12,35.13 v30.35,35.13
R5
  Top 0.406: C7.2 49.78,30.89 R10.2 51.8,28.88 51.8,19.17 52.58,18.39 IC5.5
R6  (via drill 0.6)
  Top 0.406: R5.2 50.48,14 52.32,15.85 IC5.7 v56.39,15.85 56.64,15.59 v56.64,4.8 | R_FILTER_JPR.2 117.11,15.59 116.15,14.64 116.15,3.1 v115.82,2.77
  Bottom 0.406: v115.82,2.77 58.67,2.77 v56.64,4.8
R_IN  (via drill 0.6)
  Top 0.406: C17.1 v104.65,23.09 | v116.59,19.56 116.64,19.5 120.02,19.5 120.83,18.7 120.83,14.01 119.87,13.05 R_FILTER_JPR.3
  Bottom 0.406: v104.65,23.09 108.17,19.56 v116.59,19.56
R_OUT
  Bottom 0.508: POT_R_OPT.2 114.53,16.71 114.97,16.71 116.39,18.13 R_FILTER_JPR.1 119.61,17.02 120.05,17.02 122.79,14.27 124.08,14.27 124.79,13.56 124.79,11.83 OUTPUT.8
SUB1  (via drill 0.6)
  Top 0.406: IC1.6 v18.8,28.42 18.8,23.34 TP7.TP | R11.2 15.37,36.99 16.43,35.93 16.55,35.93 R28.1 R27.1 v19.56,32.36
  Bottom 0.406: v19.56,32.36 19.56,29.18 v18.8,28.42
SUB2  (via drill 0.6)
  Top 0.406: R11.1 18.41,31.91 18.41,29.72 | 18.41,29.72 18.41,29.32 17.89,28.8 v17.89,25.22 | 18.41,29.72 18.44,29.69 IC1.7
  Bottom 0.406: v17.89,25.22 14.48,25.22 13.32,26.39 4.32,26.39 ADD.2
SUB3  (via drill 0.6)
  Top 0.406: POT2.8 33.49,48.61 33.27,48.83 v33.27,49.38 | v27.43,24.1 27.43,24.61 27.41,24.63 27.41,45.16 27.46,45.21 27.46,48.13 v28.59,49.27 | C43.2 R13.2 11.77,25.1 11.89,25.1 12.95,24.04 R12.1 14.79,24.04 v14.86,23.98 14.86,22.45 TP6.TP
  Bottom 0.406: v27.43,24.1 14.99,24.1 v14.86,23.98 | v33.27,49.38 28.7,49.38 v28.59,49.27
SUB4  (via drill 0.6)
  Top 0.406: POT2.9 v36.7,47.34
  Bottom 0.406: v36.7,47.34 46.86,47.34 C11.1
SUB5
  Top 0.406: C11.2 52.52,46.33 R15.2 53.91,44.93 IC6.5
SUB_IN
  Top 0.406: IC6.7 55.24,39.6 55.56,39.28 55.56,37.06 | 55.56,37.06 C21.1 | R3.2 55.5,37.12 55.56,37.06
SUB_OUT_1
  Top 0.508: POT_SUB_1_OPT.2 114.43,24.48 116.97,27.02 0°-180°.3
  Bottom 0.508: 0°-180°.3 119.61,25.91 120.05,25.91 121.18,24.77 121.18,21.35 122.02,20.52 123.72,20.52 OUTPUT.2
SUB_OUT_2
  Bottom 0.508: 0°-180°.2 117.37,23.36 116.94,23.36 116.1,22.53 116.1,21.35 116.94,20.52 119.46,20.52 123.07,16.91 124.79,16.91 OUTPUT.4
SUB_PHASE  (via drill 0.6)
  Top 0.406: v57.26,24.61 56.49,25.37 IC4.6 IC4.7 56.01,24.1 56.31,23.8 56.31,22.24 55.97,21.89 53.67,21.89 53.53,21.75 R36.1 | C23.1 69.34,21.18 v69.22,21.31 | v109.58,14.74 109.58,28.02 v109.98,28.42
  Bottom 0.406: v57.26,24.61 60.05,24.61 62.36,22.3 68.22,22.3 v69.22,21.31 75.78,14.74 v109.58,14.74 | v109.98,28.42 122.17,28.42 POT_SUB_2_OPT.1

## Text on the board
tNames: Johannes Melcher-Millner & Fabio Scheffknecht | HTL Rankweil 3CHEL | Steuerungsmodul Verstärker | 20.01.2023 | V1.1